# Altium PCB PCB.PcbDoc
Units mm, origin at the board's own origin, x right, y up, seen from the top; angles counter-clockwise.
Board outline 260 x 100 mm, 2 copper layers (Top Layer, Bottom Layer), stack 1.421 mm thick; 202 components, 162 nets, 664 pads, 0 vias.
Unrouted connection lines stored in the file: 373.
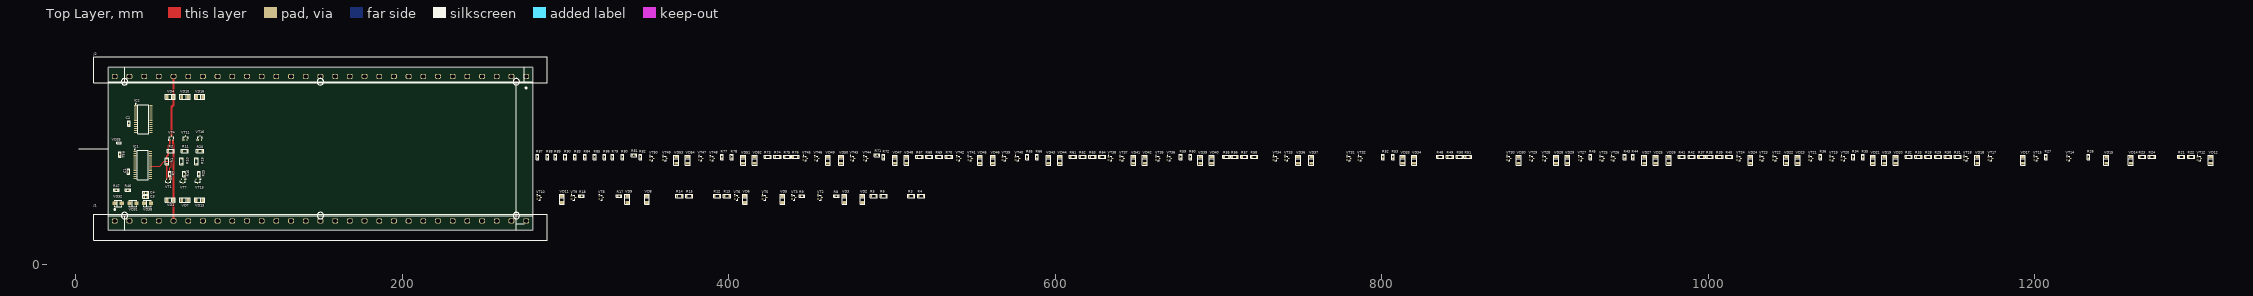
[diagram p0: Top Layer view]
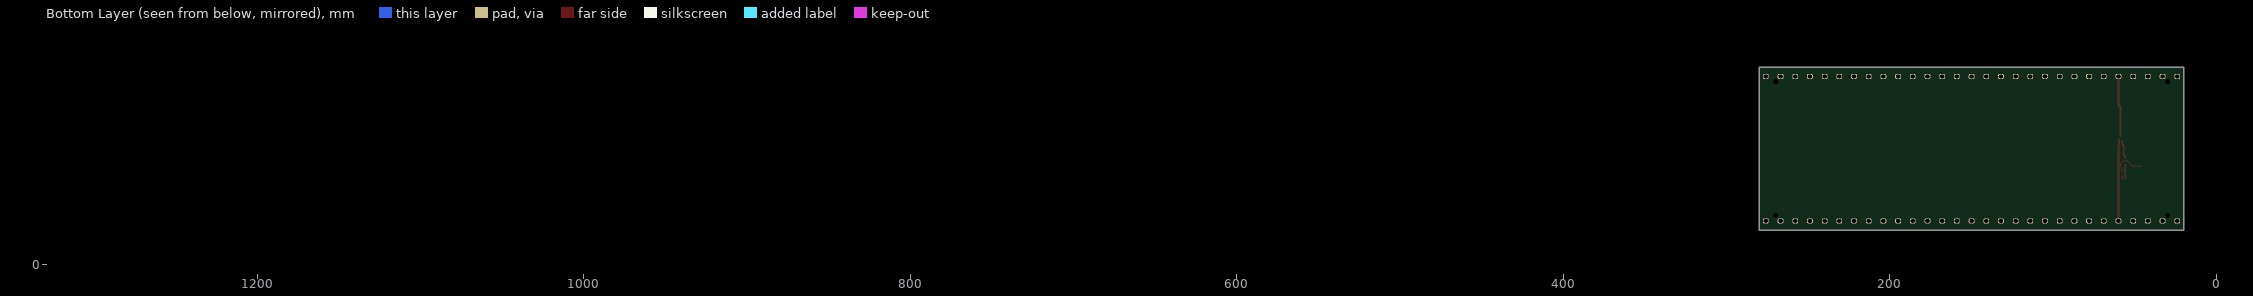
[diagram p1: Bottom Layer view, seen from below]

## Layer stack, top to bottom
Top Solder: solder mask 0.0102, Solder Resist, Dk 3.5
Top Layer: signal copper 0.0356
Dielectric 1: dielectric 1.35, FR-4, Dk 4.8
Bottom Layer: signal copper 0.0356
Bottom Solder: solder mask 0.0102, Solder Resist, Dk 3.5

## Board outline
280,21 280,121 20,121 20,21

## Design rules (kind name [scope] priority, off if disabled: settings)
Clearance [All] p1: gap=0.254 ignorepadtopadclearanceinfootprint=FALSE except(0: Arc-Hole Track-Hole SMDPad-Hole THPad-Hole Via-Hole Fill-Hole Poly-Hole Region-Hole Text-Hole)
PolygonConnect [All] p1: connectstyle=Relief reliefconductorwidth=0.254 reliefentries=4 polygonreliefangle="90 Angle" airgapwidth=0.254
RoutingVias [All] p1: holewidth=0.711 width=1.27 viastyle="Through Hole" minholewidth=0.711 minwidth=1.27 maxholewidth=0.711 maxwidth=1.27
SolderMaskExpansion [All] p1: expansion=0.102 istentingtop=FALSE
Width [All] p1: maxlimit=1.4 minlimit=0.4 preferedwidth=0.8 minimp=50.000000 maximp=50.000000 favimp=50.000000
30 further rules are at their usual default settings.

## Components (designator, comment, footprint, x,y, rotation, side; value= is the part's Value field where it differs from the comment)
C1 "Ceramic capacitor, 0,1мкФ, X7R, ±10%, 16V, 0805, -55...+125°C" "CAP: 0805" 32.5,57 r90 top value=0,1мкФ
C2 "Ceramic capacitor, 0,1мкФ, X7R, ±10%, 16V, 0805, -55...+125°C" "CAP: 0805" 32.75,86.513 r90 top value=0,1мкФ
C3 "Ceramic capacitor, 100мкФ, X7R, ±10%, 16V, 0805, -55...+125°C" "CAP: 0805" 43,41.5 r180 top value=100мкФ
C4 "Ceramic capacitor, 0,1мкФ, X7R, ±10%, 16V, 0805, -55...+125°C" "CAP: 0805" 43,44 r180 top value=0,1мкФ
IC1 "MCP23017-E_SO" SOIC127P1030X265-28N 41.075,60.945 r0 top
IC2 "MCP23017-E_SO" SOIC127P1030X265-28N 41.425,89.028 r0 top
J1 "CONNECTOR_29PIN" CONNECTOR_29PIN 150,26.75 r0 top locked
J2 "CONNECTOR_29PIN" CONNECTOR_29PIN 150,115.25 r180 top locked
R1 "Resistor film, 1K, ±5%, 1206, 0.25W, -55...+125°C" "RES: 1206" 55.95,63.25 r270 top value=1K
R2 "Resistor film, 10K, ±5%, 1206, 0.25W, -55...+125°C" "RES: 1206" 58.25,69.5 r180 top value=10K
R3 "Resistor film, 1K, ±5%, 1206, 0.25W, -55...+125°C" "RES: 1206" 512,42 r0 top value=1K
R4 "Resistor film, 10K, ±5%, 1206, 0.25W, -55...+125°C" "RES: 1206" 518,42 r0 top value=10K
R5 "Resistor film, 1K, ±5%, 1206, 0.25W, -55...+125°C" "RES: 1206" 489,42 r0 top value=1K
R6 "Resistor film, 10K, ±5%, 1206, 0.25W, -55...+125°C" "RES: 1206" 495,42 r0 top value=10K
R7 "Resistor film, 1K, ±5%, 0805, 0.125W, -55...+125°C" "RES: 0805" 57.75,55.5 r270 top value=1K
R8 "Resistor film, 1K, ±5%, 0805, 0.125W, -55...+125°C" "RES: 0805" 466,42 r0 top value=1K
R9 "Resistor film, 1K, ±5%, 0805, 0.125W, -55...+125°C" "RES: 0805" 445,42 r0 top value=1K
R10 "Resistor film, 1K, ±5%, 1206, 0.25W, -55...+125°C" "RES: 1206" 64.95,63.25 r270 top value=1K
R11 "Resistor film, 10K, ±5%, 1206, 0.25W, -55...+125°C" "RES: 1206" 66.944,69.5 r180 top value=10K
R12 "Resistor film, 1K, ±5%, 1206, 0.25W, -55...+125°C" "RES: 1206" 393,42 r0 top value=1K
R13 "Resistor film, 10K, ±5%, 1206, 0.25W, -55...+125°C" "RES: 1206" 399,42 r0 top value=10K
R14 "Resistor film, 1K, ±5%, 1206, 0.25W, -55...+125°C" "RES: 1206" 370,42 r0 top value=1K
R15 "Resistor film, 10K, ±5%, 1206, 0.25W, -55...+125°C" "RES: 1206" 376,42 r0 top value=10K
R16 "Resistor film, 1K, ±5%, 0805, 0.125W, -55...+125°C" "RES: 0805" 66.613,55.5 r270 top value=1K
R17 "Resistor film, 1K, ±5%, 0805, 0.125W, -55...+125°C" "RES: 0805" 333,42 r0 top value=1K
R18 "Resistor film, 1K, ±5%, 0805, 0.125W, -55...+125°C" "RES: 0805" 310,42 r0 top value=1K
R19 "Resistor film, 1K, ±5%, 1206, 0.25W, -55...+125°C" "RES: 1206" 74.137,63.25 r90 top value=1K
R20 "Resistor film, 10K, ±5%, 1206, 0.25W, -55...+125°C" "RES: 1206" 76.235,69.5 r180 top value=10K
R21 "Resistor film, 1K, ±5%, 1206, 0.25W, -55...+125°C" "RES: 1206" 1290.001,66 r0 top value=1K
R22 "Resistor film, 10K, ±5%, 1206, 0.25W, -55...+125°C" "RES: 1206" 1296.001,66 r0 top value=10K
R23 "Resistor film, 1K, ±5%, 1206, 0.25W, -55...+125°C" "RES: 1206" 1266.001,66 r0 top value=1K
R24 "Resistor film, 10K, ±5%, 1206, 0.25W, -55...+125°C" "RES: 1206" 1272.001,66 r0 top value=10K
R25 "Resistor film, 1K, ±5%, 0805, 0.125W, -55...+125°C" "RES: 0805" 75.63,55.5 r270 top value=1K
R26 "Resistor film, 1K, ±5%, 0805, 0.125W, -55...+125°C" "RES: 0805" 1233.001,66 r90 top value=1K
R27 "Resistor film, 1K, ±5%, 0805, 0.125W, -55...+125°C" "RES: 0805" 1207.001,66 r90 top value=1K
R28 "Resistor film, 1K, ±5%, 1206, 0.25W, -55...+125°C" "RES: 1206" 1135.001,66 r0 top value=1K
R29 "Resistor film, 10K, ±5%, 1206, 0.25W, -55...+125°C" "RES: 1206" 1141.001,66 r0 top value=10K
R30 "Resistor film, 1K, ±5%, 1206, 0.25W, -55...+125°C" "RES: 1206" 1147.001,66 r0 top value=1K
R31 "Resistor film, 10K, ±5%, 1206, 0.25W, -55...+125°C" "RES: 1206" 1153.001,66 r0 top value=10K
R32 "Resistor film, 1K, ±5%, 1206, 0.25W, -55...+125°C" "RES: 1206" 1123.001,66 r0 top value=1K
R33 "Resistor film, 10K, ±5%, 1206, 0.25W, -55...+125°C" "RES: 1206" 1129.001,66 r0 top value=10K
R34 "Resistor film, 1K, ±5%, 0805, 0.125W, -55...+125°C" "RES: 0805" 1089.001,66 r90 top value=1K
R35 "Resistor film, 1K, ±5%, 0805, 0.125W, -55...+125°C" "RES: 0805" 1095.001,66 r90 top value=1K
R36 "Resistor film, 1K, ±5%, 0805, 0.125W, -55...+125°C" "RES: 0805" 1069.001,66 r90 top value=1K
R37 "Resistor film, 1K, ±5%, 1206, 0.25W, -55...+125°C" "RES: 1206" 996.001,66 r0 top value=1K
R38 "Resistor film, 10K, ±5%, 1206, 0.25W, -55...+125°C" "RES: 1206" 1001.001,66 r0 top value=10K
R39 "Resistor film, 1K, ±5%, 1206, 0.25W, -55...+125°C" "RES: 1206" 1007.001,66 r0 top value=1K
R40 "Resistor film, 10K, ±5%, 1206, 0.25W, -55...+125°C" "RES: 1206" 1013.001,66 r0 top value=10K
R41 "Resistor film, 1K, ±5%, 1206, 0.25W, -55...+125°C" "RES: 1206" 984.001,66 r0 top value=1K
R42 "Resistor film, 10K, ±5%, 1206, 0.25W, -55...+125°C" "RES: 1206" 990.001,66 r0 top value=10K
R43 "Resistor film, 1K, ±5%, 0805, 0.125W, -55...+125°C" "RES: 0805" 949.001,66 r90 top value=1K
R44 "Resistor film, 1K, ±5%, 0805, 0.125W, -55...+125°C" "RES: 0805" 954.001,66 r90 top value=1K
R45 "Resistor film, 1K, ±5%, 0805, 0.125W, -55...+125°C" "RES: 0805" 928.001,66 r90 top value=1K
R46 "Resistor film, 4К7, ±5%, 0805, 0.125W, -55...+125°C" "RES: 0805" 32.017,45.75 r0 top value=4К7
R47 "Resistor film, 4К7, ±5%, 0805, 0.125W, -55...+125°C" "RES: 0805" 25,45.75 r180 top value=4К7
R48 "Resistor film, 1K, ±5%, 1206, 0.25W, -55...+125°C" "RES: 1206" 836,66 r0 top value=1K
R49 "Resistor film, 10K, ±5%, 1206, 0.25W, -55...+125°C" "RES: 1206" 842,66 r0 top value=10K
R50 "Resistor film, 1K, ±5%, 1206, 0.25W, -55...+125°C" "RES: 1206" 848,66 r0 top value=1K
R51 "Resistor film, 10K, ±5%, 1206, 0.25W, -55...+125°C" "RES: 1206" 853,66 r0 top value=10K
R52 "Resistor film, 1K, ±5%, 0805, 0.125W, -55...+125°C" "RES: 0805" 801,66 r90 top value=1K
R53 "Resistor film, 1K, ±5%, 0805, 0.125W, -55...+125°C" "RES: 0805" 807,66 r90 top value=1K
R54 "Resistor film, 1K, ±5%, 0805, 0.125W, -55...+125°C" "RES: 0805" 27.25,67.5 r90 top value=1K
R55 "Resistor film, 1K, ±5%, 1206, 0.25W, -55...+125°C" "RES: 1206" 705,66 r0 top value=1K
R56 "Resistor film, 10K, ±5%, 1206, 0.25W, -55...+125°C" "RES: 1206" 710,66 r0 top value=10K
R57 "Resistor film, 1K, ±5%, 1206, 0.25W, -55...+125°C" "RES: 1206" 716,66 r0 top value=1K
R58 "Resistor film, 10K, ±5%, 1206, 0.25W, -55...+125°C" "RES: 1206" 722,66 r0 top value=10K
R59 "Resistor film, 1K, ±5%, 0805, 0.125W, -55...+125°C" "RES: 0805" 677,66 r90 top value=1K
R60 "Resistor film, 1K, ±5%, 0805, 0.125W, -55...+125°C" "RES: 0805" 683,66 r90 top value=1K
R61 "Resistor film, 1K, ±5%, 1206, 0.25W, -55...+125°C" "RES: 1206" 611,66 r0 top value=1K
R62 "Resistor film, 10K, ±5%, 1206, 0.25W, -55...+125°C" "RES: 1206" 617,66 r0 top value=10K
R63 "Resistor film, 1K, ±5%, 1206, 0.25W, -55...+125°C" "RES: 1206" 623,66 r0 top value=1K
R64 "Resistor film, 10K, ±5%, 1206, 0.25W, -55...+125°C" "RES: 1206" 629,66 r0 top value=10K
R65 "Resistor film, 1K, ±5%, 0805, 0.125W, -55...+125°C" "RES: 0805" 583,66 r90 top value=1K
R66 "Resistor film, 1K, ±5%, 0805, 0.125W, -55...+125°C" "RES: 0805" 589,66 r90 top value=1K
R67 "Resistor film, 1K, ±5%, 1206, 0.25W, -55...+125°C" "RES: 1206" 517,66 r0 top value=1K
R68 "Resistor film, 10K, ±5%, 1206, 0.25W, -55...+125°C" "RES: 1206" 523,66 r0 top value=10K
R69 "Resistor film, 1K, ±5%, 1206, 0.25W, -55...+125°C" "RES: 1206" 529,66 r0 top value=1K
R70 "Resistor film, 10K, ±5%, 1206, 0.25W, -55...+125°C" "RES: 1206" 535,66 r0 top value=10K
R71 "Resistor film, 1K, ±5%, 0805, 0.125W, -55...+125°C" "RES: 0805" 491,67 r0 top value=1K
R72 "Resistor film, 1K, ±5%, 0805, 0.125W, -55...+125°C" "RES: 0805" 495,66 r90 top value=1K
R73 "Resistor film, 1K, ±5%, 1206, 0.25W, -55...+125°C" "RES: 1206" 424,66 r0 top value=1K
R74 "Resistor film, 10K, ±5%, 1206, 0.25W, -55...+125°C" "RES: 1206" 430,66 r0 top value=10K
R75 "Resistor film, 1K, ±5%, 1206, 0.25W, -55...+125°C" "RES: 1206" 436,66 r0 top value=1K
R76 "Resistor film, 10K, ±5%, 1206, 0.25W, -55...+125°C" "RES: 1206" 441,66 r0 top value=10K
R77 "Resistor film, 1K, ±5%, 0805, 0.125W, -55...+125°C" "RES: 0805" 396,66 r90 top value=1K
R78 "Resistor film, 1K, ±5%, 0805, 0.125W, -55...+125°C" "RES: 0805" 402,66 r90 top value=1K
R79 "Resistor film, 4К7, ±5%, 0805, 0.125W, -55...+125°C" "RES: 0805" 329,66 r90 top value=4К7
R80 "Resistor film, 0, ±5%, 0805, 0.125W, -55...+125°C" "RES: 0805" 335,66 r90 top value=0
R81 "Resistor film, 4К7, ±5%, 0805, 0.125W, -55...+125°C" "RES: 0805" 342,67 r0 top value=4К7
R82 "Resistor film, 0, ±5%, 0805, 0.125W, -55...+125°C" "RES: 0805" 346,66 r90 top value=0
R83 "Resistor film, 4К7, ±5%, 0805, 0.125W, -55...+125°C" "RES: 0805" 306,66 r90 top value=4К7
R84 "Resistor film, 0, ±5%, 0805, 0.125W, -55...+125°C" "RES: 0805" 312,66 r90 top value=0
R85 "Resistor film, 4К7, ±5%, 0805, 0.125W, -55...+125°C" "RES: 0805" 318,66 r90 top value=4К7
R86 "Resistor film, 0, ±5%, 0805, 0.125W, -55...+125°C" "RES: 0805" 324,66 r90 top value=0
R87 "Resistor film, 4К7, ±5%, 0805, 0.125W, -55...+125°C" "RES: 0805" 283,66 r90 top value=4К7
R88 "Resistor film, 0, ±5%, 0805, 0.125W, -55...+125°C" "RES: 0805" 289,66 r90 top value=0
R89 "Resistor film, 4К7, ±5%, 0805, 0.125W, -55...+125°C" "RES: 0805" 294,66 r90 top value=4К7
R90 "Resistor film, 0, ±5%, 0805, 0.125W, -55...+125°C" "RES: 0805" 300,66 r90 top value=0
VD1 "Single diode, 75V, 150mA, 1V, 4ns, SOD-323, -55...+150°C" "DIODE: SMA" 58,39.5 r0 top
VD2 "Single diode, 75V, 150mA, 1V, 4ns, SOD-323, -55...+150°C" "DIODE: SMA" 482,40 r90 top
VD3 "Single diode, 75V, 150mA, 1V, 4ns, SOD-323, -55...+150°C" "DIODE: SMA" 471,40 r90 top
VD4 "Single diode, 75V, 150mA, 1V, 4ns, SOD-323, -55...+150°C" "DIODE: SMA" 58,102.75 r0 top
VD5 "Single diode, 75V, 150mA, 1V, 4ns, SOD-323, -55...+150°C" "DIODE: SMA" 433,40 r90 top
VD6 "Single diode, 75V, 150mA, 1V, 4ns, SOD-323, -55...+150°C" "DIODE: SMA" 410,40 r90 top
VD7 "Single diode, 75V, 150mA, 1V, 4ns, SOD-323, -55...+150°C" "DIODE: SMA" 67,39.5 r0 top
VD8 "Single diode, 75V, 150mA, 1V, 4ns, SOD-323, -55...+150°C" "DIODE: SMA" 350,40 r90 top
VD9 "Single diode, 75V, 150mA, 1V, 4ns, SOD-323, -55...+150°C" "DIODE: SMA" 338,40 r90 top
VD10 "Single diode, 75V, 150mA, 1V, 4ns, SOD-323, -55...+150°C" "DIODE: SMA" 67,102.75 r0 top
VD11 "Single diode, 75V, 150mA, 1V, 4ns, SOD-323, -55...+150°C" "DIODE: SMA" 298,40 r90 top
VD12 "Single diode, 75V, 150mA, 1V, 4ns, SOD-323, -55...+150°C" "DIODE: SMA" 1308.001,64 r90 top
VD13 "Single diode, 75V, 150mA, 1V, 4ns, SOD-323, -55...+150°C" "DIODE: SMA" 75.981,39.5 r0 top
VD14 "Single diode, 75V, 150mA, 1V, 4ns, SOD-323, -55...+150°C" "DIODE: SMA" 1259.001,64 r90 top
VD15 "Single diode, 75V, 150mA, 1V, 4ns, SOD-323, -55...+150°C" "DIODE: SMA" 1244.001,64 r90 top
VD16 "Single diode, 75V, 150mA, 1V, 4ns, SOD-323, -55...+150°C" "DIODE: SMA" 76,102.75 r0 top
VD17 "Single diode, 75V, 150mA, 1V, 4ns, SOD-323, -55...+150°C" "DIODE: SMA" 1193.001,64 r90 top
VD18 "Single diode, 75V, 150mA, 1V, 4ns, SOD-323, -55...+150°C" "DIODE: SMA" 1165.001,64 r90 top
VD19 "Single diode, 75V, 150mA, 1V, 4ns, SOD-323, -55...+150°C" "DIODE: SMA" 1108.001,64 r90 top
VD20 "Single diode, 75V, 150mA, 1V, 4ns, SOD-323, -55...+150°C" "DIODE: SMA" 1115.001,64 r90 top
VD21 "Single diode, 75V, 150mA, 1V, 4ns, SOD-323, -55...+150°C" "DIODE: SMA" 1101.001,64 r90 top
VD22 "Single diode, 75V, 150mA, 1V, 4ns, SOD-323, -55...+150°C" "DIODE: SMA" 1048.001,64 r90 top
VD23 "Single diode, 75V, 150mA, 1V, 4ns, SOD-323, -55...+150°C" "DIODE: SMA" 1055.001,64 r90 top
VD24 "Single diode, 75V, 150mA, 1V, 4ns, SOD-323, -55...+150°C" "DIODE: SMA" 1026.001,64 r90 top
VD25 "Single diode, 75V, 150mA, 1V, 4ns, SOD-323, -55...+150°C" "DIODE: SMA" 968.001,64 r90 top
VD26 "Single diode, 75V, 150mA, 1V, 4ns, SOD-323, -55...+150°C" "DIODE: SMA" 976.001,64 r90 top
VD27 "Single diode, 75V, 150mA, 1V, 4ns, SOD-323, -55...+150°C" "DIODE: SMA" 961.001,64 r90 top
VD28 "Single diode, 75V, 150mA, 1V, 4ns, SOD-323, -55...+150°C" "DIODE: SMA" 907,64 r90 top
VD29 "Single diode, 75V, 150mA, 1V, 4ns, SOD-323, -55...+150°C" "DIODE: SMA" 914,64 r90 top
VD30 "Single diode, 75V, 150mA, 1V, 4ns, SOD-323, -55...+150°C" "DIODE: SMA" 884,64 r90 top
VD31 "Single diode, 75V, 150mA, 1V, 4ns, SOD-323, -55...+150°C" "DIODE: SMB" 35.16,37.5 r180 top
VD32 "Single diode, 75V, 150mA, 1V, 4ns, SOD-323, -55...+150°C" "DIODE: SMB" 26.128,37.5 r180 top
VD33 "Single diode, 75V, 150mA, 1V, 4ns, SOD-323, -55...+150°C" "DIODE: SMA" 813,64 r90 top
VD34 "Single diode, 75V, 150mA, 1V, 4ns, SOD-323, -55...+150°C" "DIODE: SMA" 820,64 r90 top
VD35 "LED, Green, *, *, *, -55...+150°C" "LED: 0603R" 26.5,74.5 r180 top
VD36 "Single diode, 75V, 150mA, 1V, 4ns, SOD-323, -55...+150°C" "DIODE: SMA" 749,64 r90 top
VD37 "Single diode, 75V, 150mA, 1V, 4ns, SOD-323, -55...+150°C" "DIODE: SMA" 757,64 r90 top
VD38 "Single diode, 75V, 150mA, 1V, 4ns, SOD-323, -55...+150°C" "DIODE: SMB" 44.101,37.5 r180 top
VD39 "Single diode, 75V, 150mA, 1V, 4ns, SOD-323, -55...+150°C" "DIODE: SMA" 689,64 r90 top
VD40 "Single diode, 75V, 150mA, 1V, 4ns, SOD-323, -55...+150°C" "DIODE: SMA" 696,64 r90 top
VD41 "Single diode, 75V, 150mA, 1V, 4ns, SOD-323, -55...+150°C" "DIODE: SMA" 648,64 r90 top
VD42 "Single diode, 75V, 150mA, 1V, 4ns, SOD-323, -55...+150°C" "DIODE: SMA" 655,64 r90 top
VD43 "Single diode, 75V, 150mA, 1V, 4ns, SOD-323, -55...+150°C" "DIODE: SMA" 596,64 r90 top
VD44 "Single diode, 75V, 150mA, 1V, 4ns, SOD-323, -55...+150°C" "DIODE: SMA" 603,64 r90 top
VD45 "Single diode, 75V, 150mA, 1V, 4ns, SOD-323, -55...+150°C" "DIODE: SMA" 554,64 r90 top
VD46 "Single diode, 75V, 150mA, 1V, 4ns, SOD-323, -55...+150°C" "DIODE: SMA" 562,64 r90 top
VD47 "Single diode, 75V, 150mA, 1V, 4ns, SOD-323, -55...+150°C" "DIODE: SMA" 502,64 r90 top
VD48 "Single diode, 75V, 150mA, 1V, 4ns, SOD-323, -55...+150°C" "DIODE: SMA" 509,64 r90 top
VD49 "Single diode, 75V, 150mA, 1V, 4ns, SOD-323, -55...+150°C" "DIODE: SMA" 461,64 r90 top
VD50 "Single diode, 75V, 150mA, 1V, 4ns, SOD-323, -55...+150°C" "DIODE: SMA" 469,64 r90 top
VD51 "Single diode, 75V, 150mA, 1V, 4ns, SOD-323, -55...+150°C" "DIODE: SMA" 409,64 r90 top
VD52 "Single diode, 75V, 150mA, 1V, 4ns, SOD-323, -55...+150°C" "DIODE: SMA" 416,64 r90 top
VD53 "Single diode, 75V, 150mA, 1V, 4ns, SOD-323, -55...+150°C" "DIODE: SMA" 368,64 r90 top
VD54 "Single diode, 75V, 150mA, 1V, 4ns, SOD-323, -55...+150°C" "DIODE: SMA" 375,64 r90 top
VT1 "NPN transistor, 45V, 100mA, 100MHz, 300mW, 0.6V, 420, SOT-23, -55...+125°C" SOT23 56.65,51.1 r270 top
VT2 "NPN transistor, 45V, 100mA, 100MHz, 300mW, 0.6V, 420, SOT-23, -55...+125°C" SOT23 456,41 r0 top
VT3 "NPN transistor, 45V, 100mA, 100MHz, 300mW, 0.6V, 420, SOT-23, -55...+125°C" SOT23 440,41 r0 top
VT4 "PNP transistor, 45V, 100mA, 100MHz, 300mW, 0.65V, 220, SOT-23, -55...+125°C" SOT23 58.75,77.5 r90 top
VT5 "PNP transistor, 45V, 100mA, 100MHz, 300mW, 0.65V, 220, SOT-23, -55...+125°C" SOT23 422,41 r0 top
VT6 "PNP transistor, 45V, 100mA, 100MHz, 300mW, 0.65V, 220, SOT-23, -55...+125°C" SOT23 405,41 r0 top
VT7 "NPN transistor, 45V, 100mA, 100MHz, 300mW, 0.6V, 420, SOT-23, -55...+125°C" SOT23 65.77,51.1 r270 top
VT8 "NPN transistor, 45V, 100mA, 100MHz, 300mW, 0.6V, 420, SOT-23, -55...+125°C" SOT23 322,41 r0 top
VT9 "NPN transistor, 45V, 100mA, 100MHz, 300mW, 0.6V, 420, SOT-23, -55...+125°C" SOT23 305,41 r0 top
VT10 "PNP transistor, 45V, 100mA, 100MHz, 300mW, 0.65V, 220, SOT-23, -55...+125°C" SOT23 284,41 r0 top
VT11 "PNP transistor, 45V, 100mA, 100MHz, 300mW, 0.65V, 220, SOT-23, -55...+125°C" SOT23 67.444,77.5 r90 top
VT12 "PNP transistor, 45V, 100mA, 100MHz, 300mW, 0.65V, 220, SOT-23, -55...+125°C" SOT23 1301.001,65 r0 top
VT13 "NPN transistor, 45V, 100mA, 100MHz, 300mW, 0.6V, 420, SOT-23, -55...+125°C" SOT23 74.837,51.1 r270 top
VT14 "NPN transistor, 45V, 100mA, 100MHz, 300mW, 0.6V, 420, SOT-23, -55...+125°C" SOT23 1221.001,65 r0 top
VT15 "NPN transistor, 45V, 100mA, 100MHz, 300mW, 0.6V, 420, SOT-23, -55...+125°C" SOT23 1201.001,65 r0 top
VT16 "PNP transistor, 45V, 100mA, 100MHz, 300mW, 0.65V, 220, SOT-23, -55...+125°C" SOT23 76.235,77.5 r90 top
VT17 "PNP transistor, 45V, 100mA, 100MHz, 300mW, 0.65V, 220, SOT-23, -55...+125°C" SOT23 1173.001,65 r0 top
VT18 "PNP transistor, 45V, 100mA, 100MHz, 300mW, 0.65V, 220, SOT-23, -55...+125°C" SOT23 1158.001,65 r0 top
VT19 "NPN transistor, 45V, 100mA, 100MHz, 300mW, 0.6V, 420, SOT-23, -55...+125°C" SOT23 1076.001,65 r0 top
VT20 "NPN transistor, 45V, 100mA, 100MHz, 300mW, 0.6V, 420, SOT-23, -55...+125°C" SOT23 1083.001,65 r0 top
VT21 "NPN transistor, 45V, 100mA, 100MHz, 300mW, 0.6V, 420, SOT-23, -55...+125°C" SOT23 1063.001,65 r0 top
VT22 "PNP transistor, 45V, 100mA, 100MHz, 300mW, 0.65V, 220, SOT-23, -55...+125°C" SOT23 1041.001,65 r0 top
VT23 "PNP transistor, 45V, 100mA, 100MHz, 300mW, 0.65V, 220, SOT-23, -55...+125°C" SOT23 1033.001,65 r0 top
VT24 "PNP transistor, 45V, 100mA, 100MHz, 300mW, 0.65V, 220, SOT-23, -55...+125°C" SOT23 1019.001,65 r0 top
VT25 "NPN transistor, 45V, 100mA, 100MHz, 300mW, 0.6V, 420, SOT-23, -55...+125°C" SOT23 935.001,65 r0 top
VT26 "NPN transistor, 45V, 100mA, 100MHz, 300mW, 0.6V, 420, SOT-23, -55...+125°C" SOT23 942.001,65 r0 top
VT27 "NPN transistor, 45V, 100mA, 100MHz, 300mW, 0.6V, 420, SOT-23, -55...+125°C" SOT23 922,65 r0 top
VT28 "PNP transistor, 45V, 100mA, 100MHz, 300mW, 0.65V, 220, SOT-23, -55...+125°C" SOT23 900,65 r0 top
VT29 "PNP transistor, 45V, 100mA, 100MHz, 300mW, 0.65V, 220, SOT-23, -55...+125°C" SOT23 892,65 r0 top
VT30 "PNP transistor, 45V, 100mA, 100MHz, 300mW, 0.65V, 220, SOT-23, -55...+125°C" SOT23 878,65 r0 top
VT31 "NPN transistor, 45V, 100mA, 100MHz, 300mW, 0.6V, 420, SOT-23, -55...+125°C" SOT23 780,65 r0 top
VT32 "NPN transistor, 45V, 100mA, 100MHz, 300mW, 0.6V, 420, SOT-23, -55...+125°C" SOT23 787,65 r0 top
VT33 "PNP transistor, 45V, 100mA, 100MHz, 300mW, 0.65V, 220, SOT-23, -55...+125°C" SOT23 742,65 r0 top
VT34 "PNP transistor, 45V, 100mA, 100MHz, 300mW, 0.65V, 220, SOT-23, -55...+125°C" SOT23 735,65 r0 top
VT35 "NPN transistor, 45V, 100mA, 100MHz, 300mW, 0.6V, 420, SOT-23, -55...+125°C" SOT23 663,65 r0 top
VT36 "NPN transistor, 45V, 100mA, 100MHz, 300mW, 0.6V, 420, SOT-23, -55...+125°C" SOT23 670,65 r0 top
VT37 "PNP transistor, 45V, 100mA, 100MHz, 300mW, 0.65V, 220, SOT-23, -55...+125°C" SOT23 641,65 r0 top
VT38 "PNP transistor, 45V, 100mA, 100MHz, 300mW, 0.65V, 220, SOT-23, -55...+125°C" SOT23 634,65 r0 top
VT39 "NPN transistor, 45V, 100mA, 100MHz, 300mW, 0.6V, 420, SOT-23, -55...+125°C" SOT23 569,65 r0 top
VT40 "NPN transistor, 45V, 100mA, 100MHz, 300mW, 0.6V, 420, SOT-23, -55...+125°C" SOT23 577,65 r0 top
VT41 "PNP transistor, 45V, 100mA, 100MHz, 300mW, 0.65V, 220, SOT-23, -55...+125°C" SOT23 548,65 r0 top
VT42 "PNP transistor, 45V, 100mA, 100MHz, 300mW, 0.65V, 220, SOT-23, -55...+125°C" SOT23 541,65 r0 top
VT43 "NPN transistor, 45V, 100mA, 100MHz, 300mW, 0.6V, 420, SOT-23, -55...+125°C" SOT23 476,65 r0 top
VT44 "NPN transistor, 45V, 100mA, 100MHz, 300mW, 0.6V, 420, SOT-23, -55...+125°C" SOT23 484,65 r0 top
VT45 "PNP transistor, 45V, 100mA, 100MHz, 300mW, 0.65V, 220, SOT-23, -55...+125°C" SOT23 447,65 r0 top
VT46 "PNP transistor, 45V, 100mA, 100MHz, 300mW, 0.65V, 220, SOT-23, -55...+125°C" SOT23 454,65 r0 top
VT47 "NPN transistor, 45V, 100mA, 100MHz, 300mW, 0.6V, 420, SOT-23, -55...+125°C" SOT23 383,65 r0 top
VT48 "NPN transistor, 45V, 100mA, 100MHz, 300mW, 0.6V, 420, SOT-23, -55...+125°C" SOT23 390,65 r0 top
VT49 "PNP transistor, 45V, 100mA, 100MHz, 300mW, 0.65V, 220, SOT-23, -55...+125°C" SOT23 361,65 r0 top
VT50 "PNP transistor, 45V, 100mA, 100MHz, 300mW, 0.65V, 220, SOT-23, -55...+125°C" SOT23 353,65 r0 top

## Footprints (in the part's own frame and the unit in brackets; to place one, negate y for a bottom-side part, rotate by r counter-clockwise, add the part's x,y. Pads: shape width x height; smd on the part's side, far side on the other; paste and mask are expansions set on the pad)
"CAP: 0805" [mm]
  rect 1x1.25 smd: 1(-1,0) 2(1,0)
  silkscreen extent -1.7,-0.82 1.7,0.82, body extent -1,-0.62 1,0.63, height 0.78
CONNECTOR_29PIN [mm]
  rrect50% 3.5x3 hole 2 slot 2.5 at 0 deg: 1(-126,0) 2(-117,0) 3(-108,0) 4(-99,0) 5(-90,0) 6(-81,0) 7(-72,0) 8(-63,0) 9(-54,0) 10(-45,0) 11(-36,0) 12(-27,0) 13(-18,0) 14(-9,0) 15(0,0) 16(9,0) 17(18,0) 18(27,0) 19(36,0) 20(45,0) 21(54,0) 22(63,0) 23(72,0) 24(81,0) 25(90,0) 26(99,0) 27(108,0) 28(117,0) 29(126,0)
  silkscreen extent -139,-12 139,7.4
"DIODE: SMA" [mm]
  rect 1.7x2.5 smd: 1(-2,0) 2(2,0)
  round 0.5 on Mech1: ""(2,0.9)
  silkscreen extent -3.05,-1.45 3.1,1.45, body extent -2.5,-1.35 2.5,1.35, height 2.28
"DIODE: SMB" [mm]
  rect 2.5x2.3 smd: 1(-2.15,0) 2(2.15,0)
  silkscreen extent -2.3,-2 2.2,2, body extent -2.75,-1.95 2.75,1.95, height 2.45
"LED: 0603R" [mm]
  rect 0.85x0.85 smd: 1(-0.7,0) 2(0.7,0)
  silkscreen extent -1.33,-0.63 1.33,0.63, body extent -0.8,-0.4 0.8,0.4, height 0.6
"RES: 0805" [mm]
  rect 1x1.25 smd: 1(-1,0) 2(1,0)
  silkscreen extent -1.7,-0.82 1.7,0.82, body extent -1,-0.6 1,0.6, height 0.44
"RES: 1206" [mm]
  rect 1x1.6 smd: 1(-1.5,0) 2(1.5,0)
  silkscreen extent -2.2,-1 2.2,1, body extent -1.65,-0.8 1.55,0.8, height 0.47
SOIC127P1030X265-28N [mm]
  rect 1.85x0.65 smd: 1(-4.675,8.255) 2(-4.675,6.985) 3(-4.675,5.715) 4(-4.675,4.445) 5(-4.675,3.175) 6(-4.675,1.905) 7(-4.675,0.635) 8(-4.675,-0.635) 9(-4.675,-1.905) 10(-4.675,-3.175) 11(-4.675,-4.445) 12(-4.675,-5.715) 13(-4.675,-6.985) 14(-4.675,-8.255) 15(4.675,-8.255) 16(4.675,-6.985) 17(4.675,-5.715) 18(4.675,-4.445) 19(4.675,-3.175) 20(4.675,-1.905) 21(4.675,-0.635) 22(4.675,0.635) 23(4.675,1.905) 24(4.675,3.175) 25(4.675,4.445) 26(4.675,5.715) 27(4.675,6.985) 28(4.675,8.255)
  silkscreen extent -5,-8.95 3.4,9.9, body extent -5.15,-8.95 5.15,8.95, height 2.65
SOT23 [mm]
  rect 1.1x0.6 smd: 1(-1.2,0.95) 2(-1.2,-0.95) 3(1.2,0)
  round 0.5 on Mech1: ""(-0.9,1.1)
  silkscreen extent -1.32,-1.5 0.7,1.92, body extent -1.32,-1.52 1.32,1.52, height 1.12

## Part data
C1 C2 C3 C4: library part Ceramic_0805, Manufacturer=Yageo, Package=0805, PartNumber=CC0805KRX7R7BB104, Temperature=-55...+125°C, Tolerance=±10%, TypeCapacitor="Ceramic capacitor", TypeDielectric=X7R, Voltage=16V, HelpURL=https://www.digikey.com/product-detail/en/yageo/CC0805KRX7R7BB104/311-1142-1-ND/303052
  C1 C2 C4: ValueManufacturerPartNumber="Ceramic capacitor, 0,1мкФ, X7R, ±10%, 16V, 0805, -55...+125°C"
  C3: ValueManufacturerPartNumber="Ceramic capacitor, 100мкФ, X7R, ±10%, 16V, 0805, -55...+125°C"
IC1 IC2: "Integrated Circuit", Arrow Part Number=MCP23017-E/SO, Manufacturer_Name=Microchip, Mouser Part Number=579-MCP23017-E/SO, Arrow Price/Stock=https://www.arrow.com/en/products/mcp23017-eso/microchip-technology, Datasheet Link=http://docs-emea.rs-online.com/webdocs/0a78/0900766b80a784c3.pdf, Height=2.65mm, Manufacturer_Part_Number=MCP23017-E/SO, Mouser Price/Stock=https://www.mouser.co.uk/ProductDetail/Microchip-Technology/MCP23017-E-SO?qs=usxtMOJb1Rz8hft7vV7YMQ%3D%3D
J1 J2: "Connector 29 pin"
R1 R2 R3 R4 R5 R6 R10 R11 R12 R13 R14 R15 R19 R20 R21 R22 R23 R24 R28 R29 R30 R31 R32 R33 R37 R38 R39 R40 R41 R42 R48 R49 R50 R51 R55 R56 R57 R58 R61 R62 R63 R64 R67 R68 R69 R70 R73 R74 R75 R76: library part Resistor_1206, Manufacturer=Yageo, Package=1206, PartNumber=RC1206JR-07100RL, Power=0.25W, Temperature=-55...+125°C, Tolerance=±5%, TypeResistor="Resistor film", HelpURL=https://www.digikey.com/product-detail/en/yageo/RC1206JR-07100RL/311-100ERCT-ND/732153
  R1 R3 R5 R10 R12 R14 R19 R21 R23 R28 R30 R32 R37 R39 R41 R48 R50 R55 R57 R61 R63 R67 R69 R73 R75: ValueManufacturerPartNumber="Resistor film, 1K, ±5%, 1206, 0.25W, -55...+125°C"
  R2 R4 R6 R11 R13 R15 R20 R22 R24 R29 R31 R33 R38 R40 R42 R49 R51 R56 R58 R62 R64 R68 R70 R74 R76: ValueManufacturerPartNumber="Resistor film, 10K, ±5%, 1206, 0.25W, -55...+125°C"
R7 R8 R9 R16 R17 R18 R25 R26 R27 R34 R35 R36 R43 R44 R45 R46 R47 R52 R53 R54 R59 R60 R65 R66 R71 R72 R77 R78 R79 R80 R81 R82 R83 R84 R85 R86 R87 R88 R89 R90: library part Resistor_0805, Manufacturer=Yageo, Package=0805, PartNumber=RC0805JR-07100RL, Power=0.125W, Temperature=-55...+125°C, Tolerance=±5%, TypeResistor="Resistor film", HelpURL=https://www.digikey.com/product-detail/en/yageo/RC0805JR-07100RL/311-100ARCT-ND/731185
  R7 R8 R9 R16 R17 R18 R25 R26 R27 R34 R35 R36 R43 R44 R45 R52 R53 R54 R59 R60 R65 R66 R71 R72 R77 R78: ValueManufacturerPartNumber="Resistor film, 1K, ±5%, 0805, 0.125W, -55...+125°C"
  R46 R47 R79 R81 R83 R85 R87 R89: ValueManufacturerPartNumber="Resistor film, 4К7, ±5%, 0805, 0.125W, -55...+125°C"
  R80 R82 R84 R86 R88 R90: ValueManufacturerPartNumber="Resistor film, 0, ±5%, 0805, 0.125W, -55...+125°C"
VD1 VD2 VD3 VD4 VD5 VD6 VD7 VD8 VD9 VD10 VD11 VD12 VD13 VD14 VD15 VD16 VD17 VD18 VD19 VD20 VD21 VD22 VD23 VD24 VD25 VD26 VD27 VD28 VD29 VD30 VD33 VD34 VD36 VD37 VD39 VD40 VD41 VD42 VD43 VD44 VD45 VD46 VD47 VD48 VD49 VD50 VD51 VD52 VD53 VD54: library part Diode_single, Current=150mA, Manufacturer="Micro Commercial", Package=SOD-323, PartNumber=SMAJ24A-TR, Temperature=-55...+150°C, Voltage=75V, VoltageDrop=1V, HelpURL=https://www.digikey.com/product-detail/en/micro-commercial-co/1N4148WX-TP/1N4148WXTPMSCT-ND/717312, RecoveryTime=4ns, TypeDiode="Single diode", ValueManufacturerPartNumber="Single diode, 75V, 150mA, 1V, 4ns, SOD-323, -55...+150°C"
VD31 VD32 VD38: library part Diode_single, Current=150mA, Manufacturer="Micro Commercial", Package=SOD-323, PartNumber=SMBJ3V3-E3/52, Temperature=-55...+150°C, Voltage=75V, VoltageDrop=1V, HelpURL=https://www.digikey.com/product-detail/en/micro-commercial-co/1N4148WX-TP/1N4148WXTPMSCT-ND/717312, RecoveryTime=4ns, TypeDiode="Single diode", ValueManufacturerPartNumber="Single diode, 75V, 150mA, 1V, 4ns, SOD-323, -55...+150°C"
VD35: library part LED_single, Color=GREEN, ColorParameter=Green, Temperature=-55...+150°C, TypeDiode=LED, ValueManufacturerPartNumber="LED, Green, *, *, *, -55...+150°C"
VT1 VT2 VT3 VT7 VT8 VT9 VT13 VT14 VT15 VT19 VT20 VT21 VT25 VT26 VT27 VT31 VT32 VT35 VT36 VT39 VT40 VT43 VT44 VT47 VT48: library part BJT_NPN_123, CurrentCE=100mA, CurrentGain=420, Frequency=100MHz, Manufacturer="ON Semiconductor", MaxPower=300mW, Package=SOT-23, PartNumber=КТ229А9, Temperature=-55...+125°C, VoltageCE=45V, VoltageSaturation=0.6V, HelpURL=https://www.digikey.com/product-detail/en/on-semiconductor/BC847CLT1G/BC847CLT1GOSCT-ND/917836, TypeTransistor="NPN transistor", ValueManufacturerPartNumber="NPN transistor, 45V, 100mA, 100MHz, 300mW, 0.6V, 420, SOT-23, -55...+125°C"
VT4 VT5 VT6 VT10 VT11 VT12 VT16 VT17 VT18 VT22 VT23 VT24 VT28 VT29 VT30 VT33 VT34 VT37 VT38 VT41 VT42 VT45 VT46 VT49 VT50: library part BJT_PNP_123, CurrentCE=100mA, CurrentGain=220, Frequency=100MHz, Manufacturer="ON Semiconductor", MaxPower=300mW, Package=SOT-23, PartNumber=КТ228А9, Temperature=-55...+125°C, VoltageCE=45V, VoltageSaturation=0.65V, HelpURL=https://www.digikey.com/product-detail/en/on-semiconductor/BC857BLT3G/BC857BLT3GOSCT-ND/2704963, TypeTransistor="PNP transistor", ValueManufacturerPartNumber="PNP transistor, 45V, 100mA, 100MHz, 300mW, 0.65V, 220, SOT-23, -55...+125°C"

## Free pads (board coordinates)
  round 0 hole 3.2 unplated: ~(30,30) ~(30,112) ~(270,30) ~(270,112)

## Nets (pads, with @x,y where several pads share a name; then routed paths per layer and width w, separated by ;. In a path a pad name is that pad's centre, name@x,y a point inside that pad or via, vN(x,y) a via of type N, cw(c..) or ccw(c..) an arc to the next point about the centre after c; other vN are vias at no path point)
3.3V: IC1.18 IC2.18
5V: C1.2 C2.2 C3.2 C4.2 IC1.9 IC2.9 J1.3 J2.28 R46.1 R47.1 R54.1 R79.1 R81.1 R83.1 R85.1 R87.1 R89.1 VD38.2
24V_IN_0: J1.5 R2.1 VD1.2 VT4.2 | length 49.8
  Top Layer w0.254: J1.5@59.95,26.8 J1.5
  Top Layer w1.4: VT4.2@59.7,76.372 VT4.2 59.7,73.8 60,73.5 60,69.5 VD1.2 J1.5
24V_IN_1: J1.6 R11.1 VD7.2 VT11.2
24V_IN_2: J1.7 R20.1 VD13.2 VT16.2
24V_IN_3: J1.8 R29.1 VD19.2 VT23.2
24V_IN_4: J1.9 R38.1 VD25.2 VT29.2
24V_IN_5: J1.10 R49.1 VD33.2 VT33.2
24V_IN_6: J1.11 R56.1 VD39.2 VT38.2
24V_IN_7: J1.12 R62.1 VD43.2 VT42.2
24V_IN_8: J1.13 R68.1 VD47.2 VT45.2
24V_IN_9: J1.14 R74.1 VD51.2 VT50.2
24V_IN_10: J1.15 R4.1 VD2.2 VT5.2
24V_IN_11: J1.16 R13.1 VD8.2 VT10.2
24V_IN_12: J1.17 R22.1 VD14.2 VT17.2
24V_IN_13: J1.18 R31.1 VD20.2 VT22.2
24V_IN_14: J1.19 R40.1 VD26.2 VT28.2
24V_IN_15: J1.20 R51.1 VD34.2 VT34.2
24V_IN_16: J1.21 R58.1 VD40.2 VT37.2
24V_IN_17: J1.22 R64.1 VD44.2 VT41.2
24V_IN_18: J1.23 R70.1 VD48.2 VT46.2
24V_IN_19: J1.24 R76.1 VD52.2 VT49.2
24V_IN_20: J1.25 R6.1 VD3.2 VT6.2
24V_IN_21: J1.26 R15.1 VD9.2 VT12.2
24V_IN_22: J1.27 R24.1 VD15.2 VT18.2
24V_IN_23: J1.28 R33.1 VD21.2 VT24.2
24V_IN_24: J1.29 R42.1 VD27.2 VT30.2
24V_OUT_0: J2.25 VD4.2 VT4.3 | length 37.1
  Top Layer w1.4: VT4.3 58.75,96.5 60,97.75 60,102.25 60,104.5 J2.25
24V_OUT_1: J2.24 VD10.2 VT11.3
24V_OUT_2: J2.23 VD16.2 VT16.3
24V_OUT_3: J2.22 VD22.2 VT23.3
24V_OUT_4: J2.21 VD28.2 VT29.3
24V_OUT_5: J2.20 VD36.2 VT33.3
24V_OUT_6: J2.19 VD41.2 VT38.3
24V_OUT_7: J2.18 VD45.2 VT42.3
24V_OUT_8: J2.17 VD49.2 VT45.3
24V_OUT_9: J2.16 VD53.2 VT50.3
24V_OUT_10: J2.15 VD5.2 VT5.3
24V_OUT_11: J2.14 VD11.2 VT10.3
24V_OUT_12: J2.13 VD17.2 VT17.3
24V_OUT_13: J2.12 VD23.2 VT22.3
24V_OUT_14: J2.11 VD29.2 VT28.3
24V_OUT_15: J2.10 VD37.2 VT34.3
24V_OUT_16: J2.9 VD42.2 VT37.3
24V_OUT_17: J2.8 VD46.2 VT41.3
24V_OUT_18: J2.7 VD50.2 VT46.3
24V_OUT_19: J2.6 VD54.2 VT49.3
24V_OUT_20: J2.5 VD6.2 VT6.3
24V_OUT_21: J2.4 VD12.2 VT12.3
24V_OUT_22: J2.3 VD18.2 VT18.3
24V_OUT_23: J2.2 VD24.2 VT24.3
24V_OUT_24: J2.1 VD30.2 VT30.3
A0_1: IC1.15 R79.2 R80.1
A0_2: IC2.15 R81.2 R82.1
A1_1: IC1.16 R83.2 R84.1
A1_2: IC2.16 R85.2 R86.1
A2_1: IC1.17 R87.2 R88.1
A2_2: IC2.17 R89.2 R90.1
GND: C1.1 C2.1 C3.1 C4.1 IC1.10 IC2.10 J1.4 J2.29 R80.2 R82.2 R84.2 R86.2 R88.2 R90.2 VD1.1 VD2.1 VD3.1 VD4.1 VD5.1 VD6.1 VD7.1 VD8.1 VD9.1 VD10.1 VD11.1 VD12.1 VD13.1 VD14.1 VD15.1 VD16.1 VD17.1 VD18.1 VD19.1 VD20.1 VD21.1 VD22.1 VD23.1 VD24.1 VD25.1 VD26.1 VD27.1 VD28.1 VD29.1 VD30.1 VD31.1 VD32.1 VD33.1 VD34.1 VD35.2 VD36.1 VD37.1 VD38.1 VD39.1 VD40.1 VD41.1 VD42.1 VD43.1 VD44.1 VD45.1 VD46.1 VD47.1 VD48.1 VD49.1 VD50.1 VD51.1 VD52.1 VD53.1 VD54.1 VT1.3 VT2.3 VT3.3 VT7.3 VT8.3 VT9.3 VT13.3 VT14.3 VT15.3 VT19.3 VT20.3 VT21.3 VT25.3 VT26.3 VT27.3 VT31.3 VT32.3 VT35.3 VT36.3 VT39.3 VT40.3 VT43.3 VT44.3 VT47.3 VT48.3
NetR1_1: R1.1 R2.2 VT4.1 | length 12.3
  Top Layer w0.8: R1.1 55.95,66.45 56.75,67.25 R2.2 56.75,72.75 57.8,73.8 VT4.1
NetR1_2: R1.2 VT1.2 | length 9.6
  Top Layer w0.8: VT1.2 55.7,61.65 55.8,61.75 R1.2
NetR3_1: R3.1 R4.2 VT5.1
NetR3_2: R3.2 VT2.2
NetR5_1: R5.1 R6.2 VT6.1
NetR5_2: R5.2 VT3.2
NetR7_2: R7.2 VT1.1 | length 2.3
  Top Layer w0.8: VT1.1 57.6,54.4 57.7,54.5 R7.2
NetR8_2: R8.2 VT2.1
NetR9_2: R9.2 VT3.1
NetR10_1: R10.1 R11.2 VT11.1
NetR10_2: R10.2 VT7.2
NetR12_1: R12.1 R13.2 VT10.1
NetR12_2: R12.2 VT8.2
NetR14_1: R14.1 R15.2 VT12.1
NetR14_2: R14.2 VT9.2
NetR16_2: R16.2 VT7.1
NetR17_2: R17.2 VT8.1
NetR18_2: R18.2 VT9.1
NetR19_1: R19.1 R20.2 VT16.1
NetR19_2: R19.2 VT13.2
NetR21_1: R21.1 R22.2 VT17.1
NetR21_2: R21.2 VT14.2
NetR23_1: R23.1 R24.2 VT18.1
NetR23_2: R23.2 VT15.2
NetR25_2: R25.2 VT13.1
NetR26_2: R26.2 VT14.1
NetR27_2: R27.2 VT15.1
NetR28_1: R28.1 R29.2 VT23.1
NetR28_2: R28.2 VT19.2
NetR30_1: R30.1 R31.2 VT22.1
NetR30_2: R30.2 VT20.2
NetR32_1: R32.1 R33.2 VT24.1
NetR32_2: R32.2 VT21.2
NetR34_2: R34.2 VT19.1
NetR35_2: R35.2 VT20.1
NetR36_2: R36.2 VT21.1
NetR37_1: R37.1 R38.2 VT29.1
NetR37_2: R37.2 VT25.2
NetR39_1: R39.1 R40.2 VT28.1
NetR39_2: R39.2 VT26.2
NetR41_1: R41.1 R42.2 VT30.1
NetR41_2: R41.2 VT27.2
NetR43_2: R43.2 VT25.1
NetR44_2: R44.2 VT26.1
NetR45_2: R45.2 VT27.1
NetR48_1: R48.1 R49.2 VT33.1
NetR48_2: R48.2 VT31.2
NetR50_1: R50.1 R51.2 VT34.1
NetR50_2: R50.2 VT32.2
NetR52_2: R52.2 VT31.1
NetR53_2: R53.2 VT32.1
NetR54_2: R54.2 VD35.1
NetR55_1: R55.1 R56.2 VT38.1
NetR55_2: R55.2 VT35.2
NetR57_1: R57.1 R58.2 VT37.1
NetR57_2: R57.2 VT36.2
NetR59_2: R59.2 VT35.1
NetR60_2: R60.2 VT36.1
NetR61_1: R61.1 R62.2 VT42.1
NetR61_2: R61.2 VT39.2
NetR63_1: R63.1 R64.2 VT41.1
NetR63_2: R63.2 VT40.2
NetR65_2: R65.2 VT39.1
NetR66_2: R66.2 VT40.1
NetR67_1: R67.1 R68.2 VT45.1
NetR67_2: R67.2 VT43.2
NetR69_1: R69.1 R70.2 VT46.1
NetR69_2: R69.2 VT44.2
NetR71_2: R71.2 VT43.1
NetR72_2: R72.2 VT44.1
NetR73_1: R73.1 R74.2 VT50.1
NetR73_2: R73.2 VT47.2
NetR75_1: R75.1 R76.2 VT49.1
NetR75_2: R75.2 VT48.2
NetR77_2: R77.2 VT47.1
NetR78_2: R78.2 VT48.1
SCL: IC1.12 IC2.12 J1.1 J2.26 R47.2 VD32.2
SDA: IC1.13 IC2.13 J1.2 J2.27 R46.2 VD31.2
SIG_0: IC1.21 R7.1 | length 20.3
  Top Layer w0.4: IC1.21 51.474,60.31 54.458,63.294 57.148,63.294 58.5,61.942 58.5,60.025 57.75,59.275 R7.1
SIG_1: IC1.22 R16.1
SIG_2: IC1.23 R25.1
SIG_3: IC1.24 R34.1
SIG_4: IC1.25 R43.1
SIG_5: IC1.26 R52.1
SIG_6: IC1.27 R59.1
SIG_7: IC1.28 R65.1
SIG_8: IC1.8 R71.1
SIG_9: IC1.7 R77.1
SIG_10: IC1.6 R8.1
SIG_11: IC1.5 R17.1
SIG_12: IC1.4 R26.1
SIG_13: IC1.3 R35.1
SIG_14: IC1.2 R44.1
SIG_15: IC1.1 R53.1
SIG_16: IC2.21 R60.1
SIG_17: IC2.22 R66.1
SIG_18: IC2.23 R72.1
SIG_19: IC2.24 R78.1
SIG_20: IC2.25 R9.1
SIG_21: IC2.26 R18.1
SIG_22: IC2.27 R27.1
SIG_23: IC2.28 R36.1
SIG_24: IC2.8 R45.1
pads on no net: IC1.11 IC1.14 IC1.19 IC1.20 IC2.1 IC2.2 IC2.3 IC2.4 IC2.5 IC2.6 IC2.7 IC2.11 IC2.14 IC2.19 IC2.20 VD1. VD2. VD3. VD4. VD5. VD6. VD7. VD8. VD9. VD10. VD11. VD12. VD13. VD14. VD15. VD16. VD17. VD18. VD19. VD20. VD21. VD22. VD23. VD24. VD25. VD26. VD27. VD28. VD29. VD30. VD33. VD34. VD36. VD37. VD39. VD40. VD41. VD42. VD43. VD44. VD45. VD46. VD47. VD48. VD49. VD50. VD51. VD52. VD53. VD54. VT1. VT2. VT3. VT4. VT5. VT6. VT7. VT8. VT9. VT10. VT11. VT12. VT13. VT14. VT15. VT16. VT17. VT18. VT19. VT20. VT21. VT22. VT23. VT24. VT25. VT26. VT27. VT28. VT29. VT30. VT31. VT32. VT33. VT34. VT35. VT36. VT37. VT38. VT39. VT40. VT41. VT42. VT43. VT44. VT45. VT46. VT47. VT48. VT49. VT50.

## Silkscreen, mask and mechanical layers (free items; w line width, h text height)
Top Overlay:
  circle w0.254: c270,112 r2
  circle w0.254: c270,30 r2
  circle w0.254: c150,112 r2
  circle w0.254: c150,30 r2
  circle w0.254: c30,30 r2
  circle w0.254: c30,112 r2
  lines w0.254: 2,71 20,71 ; 20,30 30,30 ; 20,112 30,112 ; 30,21 30,30 ; 30,121 30,112 ; 270,21 270,30 ; 270,25 275,25 ; 275,112 275,121 ; 280,30 270,30 ; 280,112 270,112 ; 30,30 270,30 ; 30,112 270,112 ; 270,30 270,112
Drill Guide:
  lines w0.254: 12.5,71 150,71 150,123 ; 20,71 332,71 ; 55,34 55,109 ; 61,34.25 61,110.25 ; 64,32.75 64,107.75 ; 70,33 70,109 ; 73,33 73,108 ; 79,33.25 79,109.25 ; 150,0 150,153 ; 150,30 150,112
Mechanical 1:
  circle w0.254: c15.85,22.5 r1
  circle w0.254: c284.15,22.5 r1
  circle w0.254: c284.15,119.5 r1
  circle w0.254: c15.85,119.5 r1
  lines w0.254: 10,16 150,16 299,16 ; 10,126 150,126 ; 12,19 150,19 ; 12,123 150,123 ; 12.5,9.5 12.5,71 ; 12.5,132.5 12.5,71 ; 13.85,129 13.85,71 ; 15.85,20.825 15.85,22.5 15.85,24.475 ; 15.85,117.525 15.85,119.5 15.85,121.175 ; 16.85,22.5 14.85,22.5 ; 16.85,119.5 14.85,119.5 ; 55,37.75 91.25,37.75 ; 55,49.152 91.152,49.152 ; 55,104.25 91.25,104.25 ; 55.75,61 91.25,61 ; 56,68.5 91.75,68.5 ; 57,53.75 91.5,53.75 ; 57,75.5 91.75,75.5 ; 283.15,22.5 285.15,22.5 ; 283.15,119.5 285.15,119.5 ; 284.15,19.675 284.15,22.5 284.15,25.525 ; 284.15,116.475 284.15,119.5 284.15,122.325 ; 285,14 286.15,15.15 286.15,71 ; 285,128 286.15,126.85 286.15,71 ; 293.826,19 150,19 ; 293.826,123 150,123 ; 299,126 150,126 ; 12.5,71 13.85,71 ; 13.85,71 13.85,13 13.85,71 ; 14.85,22.5 13.85,22.5 13.85,19 14.85,19 14.85,22.5 ; 14.85,119.5 14.85,123 13.85,123 13.85,119.5 14.85,119.5 ; 150,19 150,71 287.5,71 286.15,71 ; 150,123 150,126 ; 285.15,22.5 285.15,19 286.15,19 286.15,22.5 285.15,22.5 ; 285.15,119.5 286.15,119.5 286.15,123 285.15,123 285.15,119.5
Board Outline:
  the board outline again, w0.5